# EAGLE board Dragino Pan.v1.7 (EAGLE 7.5.0)
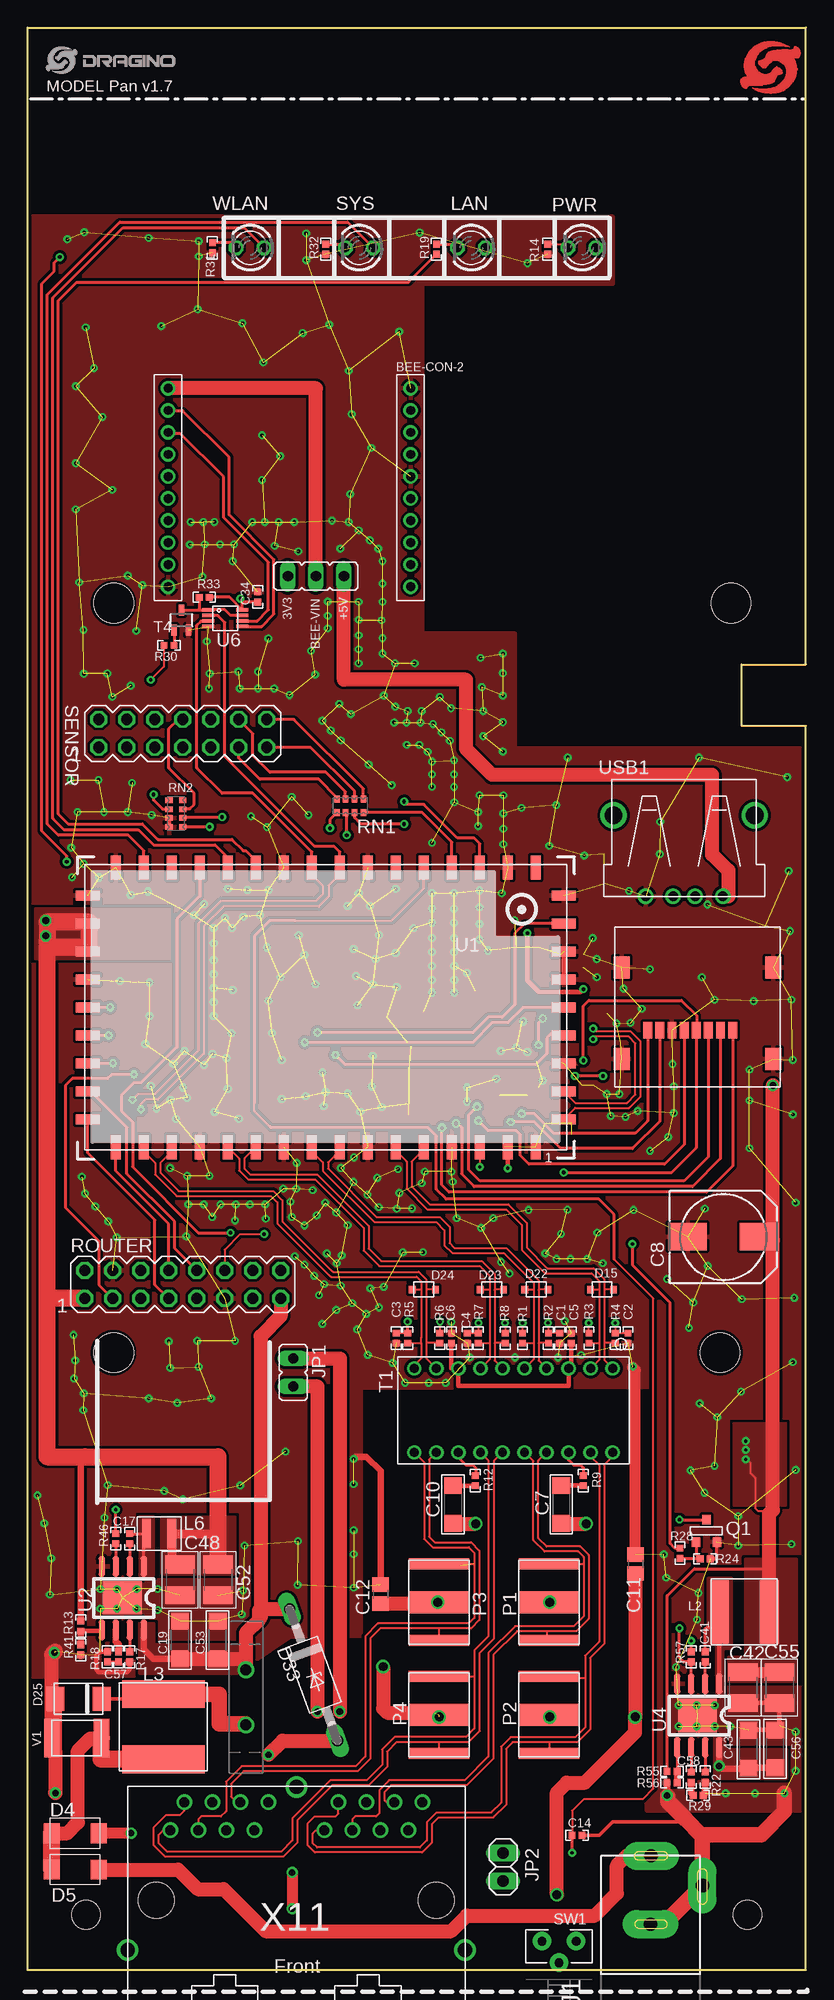
[diagram p0: board, top side]
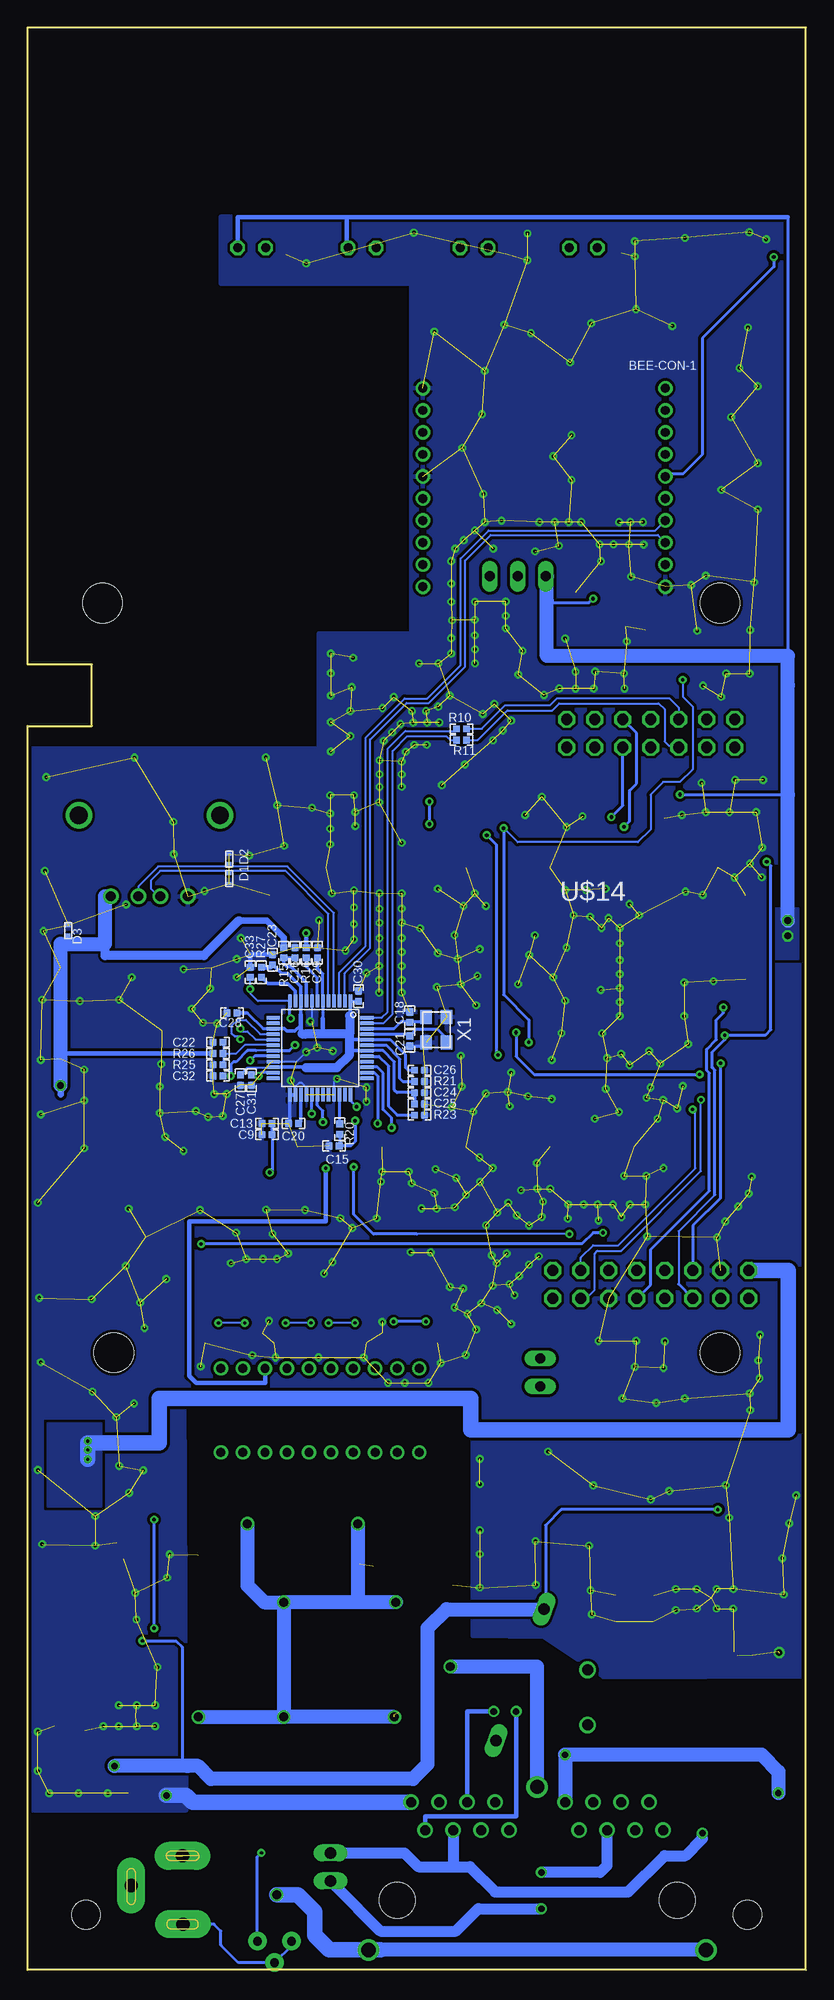
[diagram p1: board, bottom side, seen from below]

Size 70.61 x 176.23 mm. Coordinates in mm from the lower left corner, seen from the top.
Outline: 0,0 70.61,0 70.61,112.86 64.77,112.86 64.77,118.45 70.61,118.45 70.61,176.23 0,176.23 0,0
Copper layers (1*16): Top 0.035mm / dielectric 1.5mm / Bottom 0.035mm
Design rules "default *": minimum track width 8mil, minimum drill 12mil, track to track 8mil, track to pad 8mil, pad to pad 6mil, via to via 8mil, smd to smd 8mil, copper to edge 10mil, drill to drill 8mil, minimum pad ring 10mil, minimum via ring 8mil, stop-mask expansion 1mil, vias tented up to drill 30mil, thermal gap 10mil
Net classes: 0 default: width 0.203 mm, clearance 0.254 mm; 2 gnd: width 0.305 mm, drill 0.33 mm, clearance 0.254 mm; 3 usbvcc: width 0.254 mm, drill 0.61 mm, clearance 0.254 mm; 5 usbtrace: width 0.254 mm, clearance 0.152 mm; 6 usbtrace-4layer: width 0.191 mm, clearance 0.203 mm
Holes 3.6 mm at 62.81,56 7.81,56 63.81,124 7.81,124
Holes 2.6 mm at 65.31,5 5.31,5
tKeepout: area 4.8,53 to 10.8,59; area 59.8,53 to 65.8,59; area 60.8,121 to 66.8,127; area 4.8,121 to 10.8,127

## Footprints (pad centres in the part's own frame; a part is rotated, then mirrored left to right if it is on the bottom)
10P-2.0MM = drill 0.8 pad 1.27: 1 0,9; 2 0,7; 3 0,5; 4 0,3; 5 0,1; 6 0,-1; 7 0,-3; 8 0,-5; 9 0,-7; 10 0,-9
JP2 = drill 0.914 long: 1 -2.54,0; 2 0,0; 3 2.54,0
C0402 = smd 0.61 x 0.61: 1 -0.457,0; 2 0.457,0
C1206 = smd 1.52 x 1.6: 1 -1.71,0; 2 1.71,0
140CLH-0810 = smd 3.5 x 2.5: + 3.25,0; - -3.25,0
C0805 = smd 1.3 x 1.5: 1 -0.85,0; 2 0.85,0
C1210 = smd 1.6 x 2.7: 1 -1.4,0; 2 1.4,0
SOD−923 = smd 0.3 x 0.4: P$1 -0.45,0; P$2 0.45,0
DO214AC = smd 1.45 x 1.8: A 2.13,0; C -2.13,0
SOD−323 = smd 0.6 x 0.7: P$1 -1.05,0; P$2 1.05,0
DO-214AA = smd 1.62 x 2.18: A 2.11,0; C -2.11,0
F126Z12 = drill 1.016 long: A 6.35,0; C -6.35,0
GR72-135 = drill 1: P$1 -2.5,0; P$2 2.5,0
POWER_JACK_SLOT = drill 1.2 pad 2.54 long: GND@1 0,0; GND@2 4.7,3.5; PWR 0.04,6.2
JP1 = drill 0.914 long: 1 0,-1.27; 2 0,1.27
1X02 = drill 1.016 long: 1 -1.27,0; 2 1.27,0
SWPA6028S = smd 5.7 x 1.7: P$1 0,2.25; P$2 0,-2.25
LVS808040 = smd 2.5 x 7.5: P$1 -2.95,0; P$2 2.95,0
SWPA3010S = smd 0.8 x 2.7: P$1 -1.15,0; P$2 1.15,0
LED3MM = drill 0.813 octagon: A -1.27,0; K 1.27,0
GDT-LT-B3D090L = smd 1 x 5.5: 1 -3.48,0; 3 3.48,0 | smd 2 x 5.5: 2 0,0
SOT-23 = smd 0.787 x 0.889: 1 0,-1.016; 2 -0.95,1.016; 3 0.95,1.016
R0402 = smd 0.61 x 0.61: 1 -0.457,0; 2 0.457,0
0603-ARC = smd 0.5 x 0.65: 1 -1.2,-0.625; 2 -0.4,-0.625; 3 0.4,-0.625; 4 1.2,-0.625; 5 1.2,0.625; 6 0.4,0.625; 7 -0.4,0.625; 8 -1.2,0.625
MA08-2 = drill 1.016 octagon: 1 -8.89,-1.27; 2 -8.89,1.27; 3 -6.35,-1.27; 4 -6.35,1.27; 5 -3.81,-1.27; 6 -3.81,1.27; 7 -1.27,-1.27; 8 -1.27,1.27; 9 1.27,-1.27; 10 1.27,1.27; 11 3.81,-1.27; 12 3.81,1.27; 13 6.35,-1.27; 14 6.35,1.27; 15 8.89,-1.27; 16 8.89,1.27
MA07-2 = drill 1.016 octagon: 1 -7.62,-1.27; 2 -7.62,1.27; 3 -5.08,-1.27; 4 -5.08,1.27; 5 -2.54,-1.27; 6 -2.54,1.27; 7 0,-1.27; 8 0,1.27; 9 2.54,-1.27; 10 2.54,1.27; 11 5.08,-1.27; 12 5.08,1.27; 13 7.62,-1.27; 14 7.62,1.27
TS-026 = drill 0.8 pad 1.676: 1 -1.55,-0.975; 2 1.55,-0.975; 3 0,0.975
RIONET_H2038 = drill 0.8: 1 -3.81,9; 2 -3.81,7; 3 -3.81,5; 4 -3.81,3; 5 -3.81,1; 6 -3.81,-1; 7 -3.81,-3; 8 -3.81,-5; 9 -3.81,-7; 10 -3.81,-9; 11 3.81,-9; 12 3.81,-7; 13 3.81,-5; 14 3.81,-3; 15 3.81,-1; 16 3.81,1; 17 3.81,3; 18 3.81,5; 19 3.81,7; 20 3.81,9
SOT323 = smd 0.5 x 1: 1 0,0.9; 2 -0.65,-0.9; 3 0.65,-0.9
HE50 = smd 0.9 x 2.198: 1 -19.05,12.69; 2 -16.51,12.69; 3 -13.97,12.69; 4 -11.43,12.69; 5 -8.89,12.69; 6 -6.35,12.69; 7 -3.81,12.69; 8 -1.27,12.69; 9 1.27,12.69; 10 3.81,12.69; 11 6.35,12.69; 12 8.89,12.69; 13 11.43,12.69; 14 13.97,12.69; 15 16.51,12.69; 16 19.05,12.69; 26 19.05,-12.69; 27 16.51,-12.69; 28 13.97,-12.69; 29 11.43,-12.69; 30 8.89,-12.69; 31 6.35,-12.69; 32 3.81,-12.69; 33 1.27,-12.69; 34 -1.27,-12.69; 35 -3.81,-12.69; 36 -6.35,-12.69; 37 -8.89,-12.69; 38 -11.43,-12.69; 39 -13.97,-12.69; 40 -16.51,-12.69; 41 -19.05,-12.69 | smd 2.198 x 0.9: 17 21.579,10.16; 18 21.579,7.62; 19 21.579,5.08; 20 21.579,2.54; 21 21.579,0; 22 21.579,-2.54; 23 21.579,-5.08; 24 21.579,-7.62; 25 21.579,-10.16; 42 -21.579,-10.16; 43 -21.579,-7.62; 44 -21.579,-5.08; 45 -21.579,-2.54; 46 -21.579,0; 47 -21.579,2.54; 48 -21.579,5.08; 49 -21.579,7.62; 50 -21.579,10.16
RT8250-SOP8 = smd 1.88 x 0.61: 1 -1.219,0; 2 -1.219,-1.27; 3 -1.219,-2.54; 4 -1.219,-3.81; 5 4.547,-3.81; 6 4.547,-2.54; 7 4.547,-1.27; 8 4.547,0 | smd 2.997 x 3.505: 9 1.651,-1.956
AU6350_LQFP-48 = smd 1.2 x 0.3: 1 -4.25,2.75; 2 -4.25,2.25; 3 -4.25,1.75; 4 -4.25,1.25; 5 -4.25,0.75; 6 -4.25,0.25; 7 -4.25,-0.25; 8 -4.25,-0.75; 9 -4.25,-1.25; 10 -4.25,-1.75; 11 -4.25,-2.25; 12 -4.25,-2.75; 25 4.25,-2.75; 26 4.25,-2.25; 27 4.25,-1.75; 28 4.25,-1.25; 29 4.25,-0.75; 30 4.25,-0.25; 31 4.25,0.25; 32 4.25,0.75; 33 4.25,1.25; 34 4.25,1.75; 35 4.25,2.25; 36 4.25,2.75 | smd 0.3 x 1.2: 13 -2.75,-4.25; 14 -2.25,-4.25; 15 -1.75,-4.25; 16 -1.25,-4.25; 17 -0.75,-4.25; 18 -0.25,-4.25; 19 0.25,-4.25; 20 0.75,-4.25; 21 1.25,-4.25; 22 1.75,-4.25; 23 2.25,-4.25; 24 2.75,-4.25; 37 2.75,4.25; 38 2.25,4.25; 39 1.75,4.25; 40 1.25,4.25; 41 0.75,4.25; 42 0.25,4.25; 43 -0.25,4.25; 44 -0.75,4.25; 45 -1.25,4.25; 46 -1.75,4.25; 47 -2.25,4.25; 48 -2.75,4.25
US8 = smd 0.3 x 1.1: 1 -0.75,-1.55; 2 -0.25,-1.55; 3 0.25,-1.55; 4 0.75,-1.55; 5 0.75,1.55; 6 0.25,1.55; 7 -0.25,1.55; 8 -0.75,1.55
RIONET_472192001_SD = smd 0.8 x 1.5: 1 3.2,-1.55; 2 2.1,-1.55; 3 1,-1.55; 4 -0.1,-1.55; 5 -1.2,-1.55; 6 -2.3,-1.55; 7 -3.4,-1.55; 8 -4.5,-1.55 | smd 1.45 x 2: G1 6.875,-4.15; G2 6.875,4.15; G3 -6.875,4.15; G4 -6.875,-4.15
USB_C42562 = drill 0.9: 1 -3.5,5.29; 2 -1,5.29; 3 1,5.29; 4 3.5,5.29 | drill 1.6: P$1 -6.4,-2.06; P$2 6.4,-2.06
BC301N-D = smd 1.4 x 3.5: P$1 -2.25,0; P$2 2.25,0
SMARTPRJ_CRYSTAL-3.2-2.5 = smd 1.3 x 1.05: 1 -1.15,-0.925; 2 1.15,-0.925; 3 1.15,0.925; 4 -1.15,0.925
EHERNET-1X2-PLASTIC1 = drill 0.9: 1-1 2.54,-7.49; 1-2 3.81,-4.95; 1-3 5.08,-7.49; 1-4 6.35,-4.95; 1-5 7.62,-7.49; 1-6 8.89,-4.95; 1-7 10.16,-7.49; 1-8 11.43,-4.95; 2-1 -11.43,-7.49; 2-2 -10.16,-4.95; 2-3 -8.89,-7.49; 2-4 -7.62,-4.95; 2-5 -6.35,-7.49; 2-6 -5.08,-4.95; 2-7 -3.81,-7.49; 2-8 -2.54,-4.95 | drill 1.3: P$1 0,-8.89; P$2 -15.3,5.9; P$3 15.3,5.9 | hole 3.25: -12.7,1.4; 12.7,1.4

## Placement (x,y rotation side)
BEE-CON-1  BEE-1  [10P-2.0MM]  12.75,134.5 0 top
BEE-CON-2  BEE-1  [10P-2.0MM]  34.75,134.5 0 top
BEE-VIN  1x3 , 2.54 弯针  [JP2]  26.16,126.45 0 top
C1  0.1uF  [C0402]  48.29,57.32 270 top
C2  0.1uF  [C0402]  54.47,57.32 270 top
C3  0.1uF  [C0402]  33.45,57.32 270 top
C4  0.1uF  [C0402]  39.87,57.32 270 top
C5  0.1uF  [C0402]  49.33,57.32 90 top
C6  0.1uF  [C0402]  38.45,57.32 90 top
C7  1000pF 2kv  [C1206]  48.42,42.23 270 top
C8  470uF 10v  [140CLH-0810]  63.12,66.5 0 top
C9  0.1uF  [C0402]  48.89,75.78 180 bottom
C10  1000pF 2kv  [C1206]  38.58,42.23 270 top
C11  0.1uF,100V  [C0805]  55.15,36.83 270 top
C12  0.1uF,100V  [C0805]  32.04,34.09 270 top
C13  1uF  [C0402]  48.89,76.79 180 bottom
C14  1pf  [C0402]  49.84,12.2 0 top
C15  10pf,NL  [C0402]  42.8,74.76 180 bottom
C16  2.2uF  [C0402]  46.35,92.29 90 bottom
C17  0.1u,50v  [C0402]  9.27,39.12 90 top
C18  18pF  [C0402]  35.94,86.44 90 bottom
C19  10uf,50v  [C1206]  13.84,29.93 90 top
C20  1uF  [C0402]  46.48,76.79 180 bottom
C21  18pF  [C0402]  35.94,84.28 270 bottom
C22  1uF  [C0402]  53.34,84.16 180 bottom
C23  4.7uF  [C0402]  48.39,91.65 90 bottom
C24  4.7uF  [C0402]  35.05,79.59 0 bottom
C25  1uF  [C0402]  35.05,78.57 0 bottom
C26  4.7uF  [C0402]  35.05,81.62 0 bottom
C27  0.1uF  [C0402]  51.31,80.73 270 bottom
C28  0.1uF  [C0402]  52.07,86.83 180 bottom
C29  0.1uF  [C0402]  44.32,92.29 90 bottom
C30  0.1uF  [C0402]  40.59,88.35 90 bottom
C31  4.7uF  [C0402]  50.29,80.73 270 bottom
C32  4.7uF  [C0402]  53.34,81.11 180 bottom
C33  0.1uF  [C0402]  50.42,90.51 90 bottom
C34  0.1u  [C0402]  20.88,124.57 90 top
C41  0.1u,50v  [C0402]  61.47,28.41 90 top
C42  22uf,10v  [C1210]  64.9,25.61 270 top
C43  10uf,50v  [C1206]  65.41,20.02 90 top
C48  22uF,10v  [C1210]  13.82,35.39 270 top
C52  22uF,10v  [C1210]  17.27,35.39 270 top
C53  10uf,50v  [C1206]  17.25,29.93 90 top
C55  22fu,10v  [C1210]  68.2,25.61 270 top
C56  10uf,50v  [C1206]  67.82,20.05 90 top
C57  2.7nf  [C0402]  8.25,28.41 90 top
C58  2.7nf  [C0402]  60.2,17.48 90 top
D1  ESD7951ST5G  [SOD−923]  52.32,99.02 270 bottom
D2  ESD7951ST5G  [SOD−923]  52.32,100.8 90 bottom
D3  ESD7951ST5G  [SOD−923]  66.93,94.32 90 bottom
D4  STPS1L30  [DO214AC]  4.32,12.4 0 top
D5  STPS1L30  [DO214AC]  4.32,9.1 0 top
D15  BS05C  [SOD−323]  52.11,61.72 0 top
D22  BS05C  [SOD−323]  46.15,61.72 0 top
D23  BS05C  [SOD−323]  42.11,61.72 0 top
D24  BS05C  [SOD−323]  35.94,61.72 0 top
D25  SMBJ43A  [DO-214AA]  4.61,24.59 180 top
D33  1N4001  [F126Z12]  25.94,26.77 290 top
F2  GRD-GR72-135 1.35A  [GR72-135]  19.81,24.72 90 top
J1  POWER_JACKSLT  [POWER_JACK_SLOT]  56.52,4.15 0 top
JP1  [JP1]  24.11,54.2 180 top
JP2  [1X02]  43.13,9.33 270 top
L2  6.8uH / SWPA6045S6R8MT  [SWPA6028S]  65.02,32.47 90 top
L3  100uH, 1.4A, LVS808040-101  [LVS808040]  12.32,22.06 90 top
L6  4.7uH /SWPA3015S4R7MT  [SWPA3010S]  11.94,39.58 0 top
LAN  [LED3MM]  40.26,156.25 180 top
P1  3R420L  [GDT-LT-B3D090L]  47.31,33.36 270 top
P2  3R420L  [GDT-LT-B3D090L]  47.31,23.14 270 top
P3  3R420L  [GDT-LT-B3D090L]  37.34,33.36 270 top
P4  3R420L  [GDT-LT-B3D090L]  37.34,23.14 270 top
PWR  [LED3MM]  50.29,156.25 180 top
Q1  BSS138-7-F  [SOT-23]  61.59,39.84 180 top
R1  49.9  [R0402]  44.91,57.32 270 top
R2  49.9  [R0402]  47.24,57.32 270 top
R3  49.9  [R0402]  50.92,57.32 270 top
R4  49.9  [R0402]  53.31,57.32 270 top
R5  49.9  [R0402]  34.49,57.32 270 top
R6  49.9  [R0402]  37.38,57.32 270 top
R7  49.9  [R0402]  40.89,57.32 270 top
R8  49.9  [R0402]  43.33,57.32 270 top
R9  75  [R0402]  50.41,44.4 90 top
R10  330,NL  [R0402]  31.24,112.61 180 bottom
R11  330, NL  [R0402]  31.24,111.59 0 bottom
R12  75  [R0402]  40.61,44.39 90 top
R13  75K 1%  [R0402]  4.83,31.2 90 top
R14  330  [R0402]  47.18,156.13 90 top
R15  0R  [R0402]  47.37,92.29 270 bottom
R16  0R  [R0402]  45.34,92.29 270 bottom
R17  180K  [R0402]  9.27,28.41 270 top
R18  16K 1%  [R0402]  7.24,28.41 270 top
R19  330  [R0402]  37.08,156.13 90 top
R20  0R  [R0402]  42.29,76.28 270 bottom
R21  680  [R0402]  35.05,80.6 180 bottom
R22  180K  [R0402]  61.47,17.48 270 top
R23  330  [R0402]  35.05,77.55 0 bottom
R24  47K,NL  [R0402]  61.47,37.3 180 top
R25  470K  [R0402]  53.34,82.13 180 bottom
R26  47K  [R0402]  53.34,83.14 180 bottom
R27  0R  [R0402]  49.4,90.51 270 bottom
R28  4.7k  [R0402]  59.18,37.8 270 top
R29  24K  [R0402]  60.83,15.83 0 top
R30  4.7K  [R0402]  12.83,120.18 180 top
R31  330  [R0402]  16.76,156.25 90 top
R32  330  [R0402]  27.05,156.13 90 top
R33  100K  [R0402]  16.03,124.54 0 top
R41  24K 1%  [R0402]  4.83,29.04 90 top
R46  100K  [R0402]  8,39.12 270 top
R55  53.6K 1%  [R0402]  58.47,18.02 180 top
R56  10K 1%  [R0402]  58.47,16.97 0 top
R57  100K  [R0402]  60.2,28.41 90 top
RN1  4D02WGJ0000TCE 0ohm , NL  [0603-ARC]  29.26,105.62 0 top
RN2  4D02WGJ0000TCE 0ohm , NL  [0603-ARC]  13.46,104.91 270 top
ROUTER  [MA08-2]  14.07,62.19 0 top
SENSOR  [MA07-2]  14.07,112.19 0 top
SW1  TS-026  [TS-026]  48.21,1.62 180 top
SYS  [LED3MM]  30.1,156.25 180 top
T1  RJ45_TRANSFORMER_HST2038DR  [RIONET_H2038]  44.08,50.76 270 top
T4  2SC4081/SC70  [SOT323]  13.94,122.46 0 top
U1  HE  [HE50]  27.05,87.33 180 top
U2  RT7272  [RT8250-SOP8]  10.54,35.39 270 top
U3  AU6353  [AU6350_LQFP-48]  44.07,83.65 270 bottom
U4  RT7272  [RT8250-SOP8]  62.74,24.72 270 top
U6  NC7WZ125  [US8]  17.93,122.64 270 top
U$3  LOGO-NEW  [LOGO-SILK-NEW]  1.67,172.05 0 top
U$7  [DRGAINO_LOGO_STOP]  64.51,170.07 0 top
U$14  [RIONET_472192001_SD]  60.76,86.8 0 top
USB1  USB_C42562  [USB_C42562]  59.56,102.7 180 top
V1  BC301N-D  [BC301N-D]  4.44,21.04 0 top
WLAN  [LED3MM]  20.19,156.25 180 top
X1  12Mhz  [SMARTPRJ_CRYSTAL-3.2-2.5]  33.53,85.3 270 bottom
X11  EHERNET-1X2-PLASTIC  [EHERNET-1X2-PLASTIC1]  24.38,7.72 180 top

## Library data of the parts
BEE-CON-1 BEE-CON-2 C7 C10-C12 C19 C34 C42 C43 C48 C52 C53 C55 C56 L2 USB1 X11 = dragino-passive
BEE-VIN C1-C6 C8 C9 C13-C18 C20-C33 C41 C57 C58 D1-D5 D15 D22-D25 F2 J1 JP1 L3 L6 P1-P4 R1-R33 R41 R46 R55-R57 T1 U1-U4 U6 U$3 U$7 U$14 V1 = dragino
D33 = diode
JP2 = pinhead
LAN PWR SYS WLAN = led
Q1 ROUTER SENSOR = dragino; OC_FARNELL: unknown; OC_NEWARK: unknown
RN1 RN2 = resistor-dil; OC_FARNELL: unknown; OC_NEWARK: unknown
SW1 = _RoweTel
T4 = zetex; MPN: DSS4160U-7; OC_FARNELL: 1710696; OC_NEWARK: 25R4558
X1 = rionita7

## Nets
2.0V_CTL: C5.1 C6.1 T1.3 T1.8 U1.2
+3V3: BEE-VIN.1 C34.1 C48.1 C52.1 L6.P$2 LAN.A PWR.A R13.2 R33.2 RN2.2 ROUTER.1 U1.23 U1.24 U6.8
+5V: BEE-VIN.3 C8.+ C42.1 C55.1 D3.P$1 L2.P$2 R15.1 R26.2 R55.2 ROUTER.2 USB1.1
/BEE_OE: R33.1 T4.1 U6.1 U6.7
/RESET: ROUTER.3 U1.43
BEE-RXD: BEE-CON-1.3 U6.6
BEE-TXD: BEE-CON-1.2 U6.5
BEE-VIN: BEE-CON-1.1 BEE-VIN.2
CHIP_RESETN: C22.1 R25.1 R26.1 U3.18
CPWR_V33: C9.1 C13.1 U3.20 U$14.4
DC-VIN: D5.A J1.PWR
DP1_OVRCUR: U3.14
DP1_PWRUP: U3.13
GND: BEE-CON-1.10 BEE-CON-2.1 BEE-CON-2.5 C1.2 C2.2 C3.2 C4.2 C5.2 C6.2 C8.- C9.2 C11.1 C12.1 C13.2 C14.2 C15.2 C16.2 C18.2 C19.2 C20.2 C21.2 C22.2 C23.2 C24.2 C25.2 C26.2 C27.2 C28.2 C29.2 C30.2 C31.2 C32.2 C33.2 C34.2 C42.2 C43.2 C48.2 C52.2 C53.2 C55.2 C56.2 D1.P$2 D2.P$2 D3.P$2 D25.A D33.A J1.GND@1 J1.GND@2 Q1.2 R14.1 R17.2 R18.1 R21.1 R22.2 R23.2 R24.1 R25.2 R29.2 R31.1 R32.1 R41.1 R56.1 RN2.3 RN2.4 ROUTER.4 ROUTER.11 SW1.2 SW1.3 T4.3 U1.1 U1.4 U1.7 U1.10 U1.13 U1.22 U1.25 U1.26 U1.32 U1.35 U1.40 U1.42 U1.44 U1.45 U1.48 U2.4 U2.9 U3.8 U3.21 U3.25 U3.26 U3.28 U3.33 U4.4 U4.9 U6.4 U$14.6 U$14.G1 U$14.G2 U$14.G3 U$14.G4 USB1.4 V1.P$1 X1.2 X1.4 X11.1-1 X11.2-1
GPIO1: R28.1 U1.29
GPIO15: RN1.4 U1.38
GPIO16: RN1.3 U1.39
GPIO18: ROUTER.10 U1.18
GPIO19: ROUTER.6 U1.19
GPIO20: BEE-CON-1.5 ROUTER.5 U1.20
GPIO21: ROUTER.8 U1.16
GPIO22: ROUTER.7 U1.17
GPIO23: ROUTER.9 U1.21
GPIO24: ROUTER.12 U1.3
GPIO26: RN1.2 U1.47
GPIO27: R30.2 RN1.1 U1.46
JUMPSTART: C14.1 SW1.1 U1.37
LAN_LED: R19.1 U1.31
LED_SYS: SYS.A U1.27
N$1: C1.1 R1.1 R2.1
N$2: C17.2 L6.P$1 U2.1
N$3: C2.1 R3.1 R4.1
N$4: C3.1 R5.1 R6.1
N$5: C4.1 R7.1 R8.1
N$6: PWR.K R14.2
N$7: R23.1 U3.41
N$8: C20.1 U3.27
N$9: C57.1 R18.2
N$10: R9.2 T1.18
N$11: SENSOR.2
N$12: C7.1 R9.1
N$13: C57.2 U2.6
N$14 [gnd]: R55.1 R56.2 U4.5
N$15: Q1.1 R57.1 U4.3
N$16: R21.2 U3.43
N$17: R12.2 T1.13
N$18: C10.1 R12.1
N$19: R22.1 U4.7
N$20: Q1.3 R24.2 R28.2
N$21: C58.2 U4.6
N$22: C15.1 R20.2 U$14.5
N$23: LAN.K R19.2
N$24: R27.2 U3.11
N$25: R46.2 U2.3
N$26: R17.1 U2.7
N$27: C17.1 U2.2
N$28: C58.1 R29.1
N$29: C16.1 R15.2 U3.9
N$30: R16.2 U3.7
N$31: R31.2 WLAN.K
N$32: R32.2 SYS.K
N$33: SENSOR.1
N$34: C41.2 L2.P$1 U4.1
N$35: RN1.5 SENSOR.14
N$36: R30.1 T4.2
N$38: ROUTER.16
N$43: SENSOR.3
N$45: SENSOR.7
N$46: RN2.6 SENSOR.9
N$47: RN1.8 SENSOR.11
N$48: RN1.6 SENSOR.13
N$49: R13.1 R41.2 U2.5
N$50: SENSOR.4
N$52: U1.36
N$53: D25.C F2.P$1 L3.P$2
N$54: RN2.7 SENSOR.8
N$55: C41.1 U4.2
N$56: RN2.5 SENSOR.10
N$57: RN1.7 SENSOR.12
OPTIONAL_ANT: U1.41
P0_R_N: P1.3 T1.17 X11.2-3
P0_R_P: P1.1 T1.16 X11.2-6
P0_RX_N: D22.P$2 R2.2 T1.4 U1.8
P0_RX_P: D22.P$1 R1.2 T1.5 U1.9
P0_T_N: P2.3 T1.20 X11.2-7
P0_T_P: P2.1 T1.19 X11.2-8
P0_TX_N: D15.P$2 R4.2 T1.1 U1.5
P0_TX_P: D15.P$1 R3.2 T1.2 U1.6
P4_R_N: P3.3 T1.12 X11.1-3
P4_R_P: P3.1 T1.11 X11.1-6
P4_RX_N: D24.P$2 R6.2 T1.9 U1.14
P4_RX_P: D24.P$1 R5.2 T1.10 U1.15
P4_T_N: P4.3 T1.15 X11.1-7
P4_T_P: P4.1 T1.14 X11.1-8
P4_TX_N: D23.P$2 R8.2 T1.6 U1.11
P4_TX_P: D23.P$1 R7.2 T1.7 U1.12
PE: C7.2 C10.2 C11.2 C12.2 P1.2 P2.2 P3.2 P4.2 X11.P$1 X11.P$2 X11.P$3
POE_PASSTHROUGH: JP2.2 X11.1-4
POE_VIN: D4.A JP2.1 X11.2-4
RING: JP1.1 X11.2-5
SD_CLK: R20.1 U3.34
SD_CMD: U3.36 U$14.3
SD_DAT0: U3.30 U$14.7
SD_DAT1: U3.29 U$14.8
SD_DAT2: U3.39 U$14.1
SD_DAT3: U3.38 U$14.2
TIP: JP1.2 X11.2-2
UART_RX: ROUTER.13 U1.33 U6.3
UART_TX: ROUTER.14 U1.34 U6.2
USB2_D1_N: R11.2 SENSOR.5
USB2_D1_P: R10.1 SENSOR.6
USB2_D_N: R11.1 U3.47
USB2_D_P: R10.2 U3.48
USB3_D_N [usbtrace]: BEE-CON-1.8 U3.2
USB3_D_P [usbtrace]: BEE-CON-1.7 U3.3
USB4_D_N [usbtrace-4layer]: D2.P$1 U3.4 USB1.2
USB4_D_P [usbtrace-4layer]: D1.P$1 U3.5 USB1.3
USB_N: U1.50 U3.17
USB_P: U1.49 U3.16
VCC1.8: C31.1 C32.1 C33.1 R16.1 U3.12 U3.19 U3.23
VCC3.3: C23.1 C24.1 C25.1 C26.1 C27.1 C28.1 C29.1 C30.1 R27.1 U3.1 U3.6 U3.10 U3.15 U3.22 U3.42 U3.44
VDD: C19.1 C43.1 C53.1 C56.1 D33.C F2.P$2 R46.1 R57.2 ROUTER.15 U2.8 U4.8
VIN1: D4.C D5.C L3.P$1 V1.P$2
WAN_LED: U1.28
WLAN_LED: U1.30 WLAN.A
XSCI: C18.1 U3.46 X1.1
XSCO: C21.1 U3.45 X1.3

## Tracks (layer width: path | path; a pad name or v marks a point on that pad's centre or on a via)
2.0V_CTL  (via drill 0.3)
  Top 0.406: U1.2 v43.56,72.73 | C6.1 38.45,54.57 T1.8 39.08,52.99 49.07,52.99 T1.3 49.33,54.82 C5.1
  Top 0.508: 43.56,74.78 U1.2
  Bottom 0.406: v43.56,72.73 43.56,67.93 55.96,67.93 55.96,53.88 55.32,53.25 49.07,53.25 T1.3
+3V3  (via drill 0.33, 0.6)
  Top 0.203: 2.29,50.25 2.29,48.98 1.78,48.98
  Top 0.254: 20.95,124.04 C34.1 19.61,124.11 v19.3,124.42 19.48,124.24 U6.8 18.33,124.54 R33.2 | v11.43,106.64 11.43,106.13 12.25,105.31 RN2.2
  Top 0.61: R13.2 4.83,46.16 5.23,46.57
  Top 0.813: C48.1 13.74,36.71 13.28,36.71 13.09,36.91 L6.P$2 17.27,39.58
  Top 1.524: 1.78,60.92 1.78,48.98 1.78,46.57 5.23,46.57 17.27,46.57 17.27,39.58 C52.1 | ROUTER.1 1.78,60.92 | 1.78,60.92 1.78,92.79 5.59,92.79 5.59,94.44 5.6,94.44 5.6,95.06 1.78,95.06 1.78,93.3
  Bottom 0.254: 1.65,159.05 1.65,119.21 | v11.43,106.64 1.65,106.64 | 23.49,124.16 23.37,124.04 19.68,124.04 v19.3,124.42
  Bottom 0.406: PWR.A 51.56,159.05 41.66,159.05 | LAN.A 41.66,156.25 41.66,159.05 | 1.65,159.05 41.66,159.05 | 1.65,116.54 1.65,107.91 1.78,107.78
  Bottom 1.27: v1.65,95.21 1.65,106.64 1.65,116.54 1.65,119.21 23.49,119.21 23.49,124.16 23.49,126.45 BEE-VIN.1
  other vias: 1.65,93.81
  pour Top (isolate 0.254, no thermals): 0.63,96.35 12.95,96.35 12.95,91.65 0.63,91.65
  pour Bottom (no thermals): 0.63,96.35 12.95,96.35 12.95,91.65 0.63,91.65
  pour Top (isolate 0.305, no thermals): 18.8,35.9 12.19,35.9 12.19,41.1 18.8,41.1
+5V  (via drill 0.3, 0.6)
  Top 0.203: 67.61,41.72 67.56,41.66 66.22,41.66 65.99,41.89 65.99,44.64 65.58,45.04 65.58,45.96 65.36,46.17 65.29,46.17 v65.15,46.31
  Top 0.254: R55.2 58.01,33.94 60.48,36.41 67.27,36.41
  Top 1.016: C42.1 C55.1
  Top 1.27: 67.61,41.72 67.61,66.23 | 67.61,66.23 v67.61,80.25 | 67.56,41.66 67.27,41.37 67.27,36.41 L2.P$2 | C8.+ 67.34,66.5 67.61,66.23 | USB1.1 63.57,97.41 63.57,99.78 63.5,99.78 62.1,101.18 62.1,108.41 42.16,108.41 39.75,110.83 39.75,117.05 28.7,117.05 BEE-VIN.3
  Bottom 0.305: D3.P$1 66.93,93.1
  Bottom 0.406: R26.2 67.61,83.14
  Bottom 0.61: 67.61,79.43 67.61,80.75 | R15.1 47.37,93.68 48.89,95.21 51.44,95.21
  Bottom 0.813: 51.44,95.21 54.61,92.03 63.57,92.03 63.57,93.81
  Bottom 1.016: v65.15,47.18 v65.15,47.99
  Bottom 1.27: v67.61,80.25 67.61,80.75 67.61,83.14 67.61,93.1 66.93,93.1 63.57,93.1 63.57,93.81 63.57,97.41 USB1.1
  Bottom 1.422: ROUTER.2 1.63,63.46 1.63,48.98 30.43,48.98 30.43,51.85 58.65,51.85 58.65,47.81 65.15,47.81 v65.15,47.18 v65.15,46.31
  pour Bottom (no thermals): 63.88,49.61 63.88,41.99 68.83,41.99 68.83,49.61
  pour Top (no thermals): 64.01,49.61 64.01,42.12 68.83,42.12 68.83,49.61
  pour Top (isolate 0.254, no thermals): 69.72,26.12 63.63,26.12 63.63,28.41 65.15,28.41 65.15,37.3 69.72,37.3
/BEE_OE
  Top 0.254: 13.93,123.35 T4.1 15.49,123.36 | 15.49,123.36 16.35,123.36 U6.1 16.39,123.4 17.91,123.4 18.42,122.89 U6.7 | R33.1 15.57,123.44 15.49,123.36
/RESET  (via drill 0.3, 0.33)
  Top 0.254: v9.65,81.24 7.62,81.24 7.24,80.86 4.06,80.86 3.43,80.22 3.43,69.17 6.48,66.12 6.48,62.16 ROUTER.3 | U1.43 45.08,94.95 44.2,94.06 44.2,87.59 43.05,86.44 41.78,86.44 40.39,85.05 v26.29,85.05
  Bottom 0.254: v26.29,85.05 26.29,82.89 24.64,81.24 v9.65,81.24
BEE-RXD
  Top 0.254: U6.6 20.83,122.39 21.84,123.4 21.84,127.72 17.78,131.78 17.78,135.47 13.84,139.4 12.85,139.4 BEE-CON-1.3
BEE-TXD
  Top 0.254: U6.5 21.22,121.89 22.35,123.02 22.35,127.97 18.29,132.04 18.29,137.24 14.1,141.44 12.82,141.44 BEE-CON-1.2
BEE-VIN
  Top 1.27: BEE-VIN.2 26.16,143.5 BEE-CON-1.1
CHIP_RESETN
  Bottom 0.203: U3.18 50.93,83.9 51.69,83.14 R26.1 | C22.1 R26.1 | R26.1 R25.1
CPWR_V33  (via drill 0.33)
  Top 0.254: v50.42,82.51 50.42,87.46 50.93,87.97 59.31,87.97 60.71,86.57 60.71,85.3 U$14.4 60.66,74.58 58.42,72.35 v48.64,72.35
  Bottom 0.254: U3.20 50.03,82.9 v50.42,82.51 | C13.1 48.44,72.55 v48.64,72.35
  Bottom 0.305: C13.1 C9.1
DC-VIN  (1 unrouted)
  Top 1.27: D5.A 13.66,9.1 15.44,7.32 17.78,7.32 21.59,3.51 38.43,3.51 39.83,4.91 51.44,4.91 53.47,6.94 53.47,9.48 54.36,10.37 57.29,10.37
GND  (via drill 0.3, 0.58, 0.6)  (535 unrouted)
  Top 0.203: 2.16,19.9 2.2,19.9 V1.P$1
  Top 0.254: R24.1 62.33,37.3 62.53,37.5 62.53,38.81 Q1.2 | RN2.3 RN2.4
  Top 0.305: D25.A 2.86,24.59 2.2,25.25 | C14.2 51.87,12.2 53.09,13.42 59.56,13.42 59.75,13.61
  Top 0.406: V1.P$1 2.29,20.95 | R17.2 9.27,27.26 9.02,27.01 6.48,27.01 6.22,27.26 6.22,28.53 6.55,28.86 R18.1 | C42.2 C55.2 68.2,22.14 C56.2 65.43,21.76 C43.2 | U1.44 U1.45
  Top 0.61: R22.2 61.47,16.01 R29.2 | R56.1 v58.01,15.83 | C12.1 32.04,45.26 30.73,46.57 29.78,46.57 v29.58,46.36
  Top 1.016: C11.1 55.15,54.41 54.86,54.69
  Top 1.27: 2.2,28.61 2.16,28.61 2.16,19.9 2.5,19.9 | 2.5,19.9 D25.A | 2.5,19.9 2.5,16.07 v2.52,16.06 | 58.09,15.76 v58.01,15.83 | v21.84,19.52 23.13,20.8 D33.A
  Top 1.422: 2.2,28.61 2.5,28.91 | 58.09,15.76 58.09,15.27 59.75,13.61 61.09,12.28 | 61.09,12.28 61.21,12.15 J1.GND@2 57.71,4.15 J1.GND@1 | v68.66,16.02 68.66,14.39 66.55,12.28 61.09,12.28
  Bottom 0.203: C15.2 43.31,74.76 | v42.54,80.86 42.82,80.58 U3.33 | U3.28 45.32,80.07 45.72,80.47 45.97,80.47 46.35,80.09 46.35,79.44 U3.26 | U3.8 44.82,86.06 v44.96,86.06 | U3.21 46.21,82.4 v45.34,83.27
  Bottom 0.254: C21.2 34.78,83.83 X1.2 | SW1.2 46.66,2.2 SW1.3 51.49,0.65 53.09,2.24 53.09,3.51 53.72,4.15 J1.GND@1
  Bottom 0.305: 46.35,79.44 46.39,79.4 U3.25 46.82,76.91 C20.2
  Bottom 0.406: C23.2 50.42,92.11 C33.2
  Bottom 1.27: X11.1-1 v21.84,19.52 4.03,19.52 2.5,17.99 2.5,16.07 v2.52,16.06 | X11.2-1
  Bottom 1.422: X11.2-1 55.63,15.2 56.26,15.83 v58.01,15.83
  other vias: 2.44,28.79 12.8,57.03 15.39,57.08 15.52,54.72 12.93,54.62 5.11,52.31 5.05,50.78 4.22,53.65 4.32,55.3 4.17,57.62 8.08,66.45 7.32,67.9 6.15,69.27 5.21,70.44 4.93,71.97 26.44,61.22 28.02,59.88 29.92,58.1 29.44,60.5 26.75,58.61 30.71,59.52 36.04,72.42 52.91,77.48 31.72,71.86 32.13,78.27 14.48,72.04 16.51,72.04 44.17,95.23 55.35,77.94 5.08,100.37 4.02,99.13 33.35,114.61 25.27,155.13 15.52,156.85 62.56,50.15 60.96,51.39 31.88,60.1 42.95,64.22 51.69,66.89 41.15,67.32 34.04,65.11 28.5,64.83 21.62,68.16 18.82,68 16.66,51.85 11,51.85 0.9,43.05 12.4,43.45 60.4,60.55 64.8,60.85 60,58.25 14.47,79.13 16.97,77.83 18.17,79.93 19.17,77.23 13.47,77.23 42.92,83.37 44.34,83.68 9.37,97.53 3.97,101.83 9.86,121.5 5.07,121.58 5.11,117.61 27.23,124.15 21.85,120.8 23.77,115.68 22.37,116.26 35.57,157.63 25.27,157.55 15.53,155.47 30.86,55.79 40.12,55.57 38.44,58.78 32.32,61.98 33.12,55.07 35.86,65.11 43.72,63.18 44.22,55.57 48.12,55.57 48.72,58.87 50.22,55.77 48.39,66.78 53.68,79.46 58.02,62.68 14.4,66.56 33.26,113.18 57.72,37.7 30.05,122.49 54.56,97.9 56.46,90.79 46.73,80.69 39.87,78.78 39.87,80.05 54.92,54.76 61.4,43.29 60.13,45.32 31.23,80.15 8.38,89.7 18.04,82.73 16.9,90.35 18.17,98.09 10.93,97.84 31.88,93.89 29.59,92.62 16.51,117.62 7.24,117.62 57.94,35.59 58.83,27.47 60.86,34.2 60.73,31.78 7.26,43.98 23.39,47.02 24.54,38.9 63.33,16.02 65.99,16.02 69.68,18.05 69.68,21.61 64.47,38.5 64.47,41.16 69.29,38.62 69.68,45.35 62.31,45.74 64.72,52.47 69.55,60.98 69.42,55.13 69.68,69.61 58.63,77.74 58.63,80.15 56.47,74.31 48.97,68.98 58.12,75.58 65.48,78.88 69.42,77.61 62.31,88.03 58.5,82.18 65.87,87.9 65.48,81.68 69.42,82.57 69.29,88.03 69.17,94.25 68.91,108.22 69.04,99.71 60.91,110 47.96,105.68 57.36,101.23 61.67,96.66 50.5,101.11 47.32,102 43.01,97.68 38.69,97.68 38.69,92.34 54.05,89.04 51.64,91.71 53.42,85.87 31.32,82.95 27.04,79.64 24.37,70.88 29.58,44.08 29.58,39.89 29.58,37.73 29.58,34.68 24.5,34.93 19.42,32.27 19.67,38.49 19.29,43.95 6.97,41.03 14.09,42.68 1.51,40.52 2.02,34.05 13.58,51.44 18.82,57.08 24.41,73.21 29.62,73.72 10.67,84 11.06,89.59 16.9,89.08 21.85,87.93 21.72,92.76 33.41,92.25 33.41,98.09 21.85,97.97 18.55,94.54 11.06,86.54 6.48,99.11 21.72,103.68 33.03,107.49 29.32,113.94 38.72,105.94 43.16,106.57 44.81,105.43 49,110 57.39,104.16 32.11,122.45 30.05,121.09 28.27,114.87 7.7,115.5 9.35,116.52 16.46,116.26 19.13,117.79 19.25,116.26 4.69,125.89 10.4,125.64 14.72,129.32 15.87,126.4 4.38,136.7 4.38,132.51 4.38,143.69 18.6,127.81 3.61,157.02 5.14,157.66 10.98,157.15 30.03,124.13 43.11,117.65 38.46,72.42 34.4,111.15 35.54,111.15 36.3,110.51 36.68,109.62 36.68,108.48 36.68,107.34 36.68,102.26 36.68,97.68 36.68,96.29 36.68,95.02 36.68,93.62 36.68,92.35 36.68,91.08 36.68,89.81 36.68,88.67 38.72,88.67 38.72,89.81 38.72,91.08 38.69,93.61 38.69,95.01 38.69,96.28 38.69,107.33 38.69,108.47 38.69,109.74 38.31,111.52 37.54,112.28 36.78,113.05 35.64,113.17 34.37,113.17 27.24,121.71 27.24,122.86 24.57,128.7 32.19,124.13 32.19,125.78 28.38,128.95 35.75,114.22 32.32,115.62 43.11,119.43 32.19,120.83 32.19,119.43 41.33,114.22 43.11,115.62 41.33,111.94 43.11,113.21 43.11,110.54 41,106.57 40.88,105.05 43.16,104.92 40.88,103.78 43.16,103.53 43.16,102.13 41,97.94 41,96.41 41,94.89 41,93.49 41.76,92.48 39.86,90.45 19.95,97.97 16.01,96.7 15.12,95.68 16.9,91.62 17.91,95.43 16.9,94.54 16.9,93.14 19.56,95.55 21.09,95.68 16.9,87.81 16.9,86.54 16.77,83.11 16.01,82.09 14.1,80.06 11.18,80.19 13.21,82.22 14.23,83.36 11.69,78.16 12.96,78.92 54.24,77.39 38.94,68.21 42.24,68.21 33.6,72.65 65.48,74.56 33.73,70.49 34.87,69.1 35.76,71.38 26.87,78.37 38.56,71.51 25.86,70.75 26.24,68.46 27,69.6 28.02,68.71 29.03,67.57 23.19,70.87 52.54,79.46 54.7,85.93 55.72,87.2 28.42,72.75 54.97,68.94 29.57,71.48 30.84,70.34 31.85,69.2 33.5,69.07 23.85,69.71 23.98,68.31 27.15,65.01 12.93,72.75 14.58,69.45 15.98,69.45 16.74,68.31 17.5,69.45 18.9,69.45 20.17,69.45 21.56,69.45 25.12,67.55 24.23,64.75 25.12,63.99 28.04,64.12 26.01,62.97 26.9,62.21 28.42,62.09 31.09,61.83 45.44,68.94 46.96,65.01 47.98,64.5 49.25,64.5 50.77,64.5 52.17,64.12 61.44,69.07 61.7,63.86 61.17,90.06 51.64,90.06 51.26,93.61 23.07,79.01 30.18,77.87 25.1,92.09 26.11,89.42 31.32,89.42 20.27,104.66 9.1,126.51 45.35,154.84 30.03,119.81 30.03,118.54 33.33,118.54 35.11,118.54 41.08,119.05 41.21,116.38 34.48,114.22 38.41,114.48 37.4,115.49 20.9,117.79 20.9,116.26 26.75,113.34 36.4,53.27 37.92,53.27 34.24,53.27 6.59,34.55 8.12,34.55 9.9,34.55 11.8,34.55 6.59,32.78 8.12,32.78 9.9,32.78 11.8,32.65 19.55,34.43 2.15,37.35 59.04,24.01 60.7,24.01 62.35,24.01 59.04,22.11 60.7,22.11 62.35,22.11 63.74,22.11 11.26,104.79 9.1,105.04 6.94,105.04 4.52,105.04 3.89,107.97 6.43,107.97 9.48,107.71 23.96,106.44 25.48,104.79 29.04,96.54 31.07,96.54 30.05,97.68 18.49,84.98 18.62,88.92 22.18,84.98 22.94,90.06 23.07,82.57 26.75,81.42 25.23,79.26 29.04,79.52 29.92,87.52 31.58,91.71 33.48,89.17 35,94.5 29.8,90.19 24.59,93.87 30.94,109.36 27.51,112.45 28.4,111.56 16.26,120.54 16.06,129.33 17.46,129.33 18.73,129.33 22.41,129.21 14.79,131.37 15.93,131.37 16.95,131.37 20.38,131.37 21.52,131.37 22.79,131.37 24.19,131.37 27.62,131.49 29.14,131.37 30.03,130.6 31.05,129.72 31.81,128.95 32.19,127.81 5.27,149.02 6.03,145.34 12.12,149.15 19.49,149.4 27.36,149.27 29.14,145.08 33.71,148.64 21.39,145.84 21.27,139.24 21.27,135.18 22.92,137.34 31.17,138.1 29.27,133.91 29.4,141.15 7.68,134.29 6.79,140.89 24.95,148.51 15.43,150.67 26.09,117.52 25.71,119.68
  pour Top (rank 2): 18.36,26.55 23.83,30.23 30.23,30.31 30.23,52.79 56.39,52.92 56.16,14.5 70.61,14.5 70.61,110.83 44.2,110.83 44.2,121.24 35.81,121.24 35.81,152.99 53.09,152.99 53.09,159.09 -0.76,159.09 -0.38,26.63
  pour Bottom (rank 2): -0.38,26.63 18.36,26.55 23.83,30.23 30.23,30.31 30.23,52.79 56.39,52.92 56.23,14.5 70.61,14.5 70.61,110.83 44.2,110.83 44.2,121.24 35.81,121.24 35.81,152.99 53.09,152.99 53.09,159.09 -0.76,159.09
  pour Top (isolate 0.406, no thermals): 6.1,35.01 18.8,35.01 18.8,30.69 12.32,30.69 12.32,32.34 6.22,32.34
  pour Top (isolate 0.254, no thermals): 63.63,25.23 69.6,25.23 69.6,20.66 63.88,20.66 63.88,21.67 58.67,21.67 58.67,24.47 63.63,24.47
GPIO1  (via drill 0.3)
  Top 0.254: U1.29 15.62,97.42 13.54,95.33 13.54,83.73 10.29,80.47 9.65,80.47 8.51,79.33 8.51,77.94 9.52,76.92 9.52,72.86 15.49,66.89 v18.41,66.89 | v54.86,65.87 54.86,63.97 58.29,60.54 58.29,38.69 58.72,38.26 R28.1
  Bottom 0.254: v18.41,66.89 19.3,66.89 20.32,65.87 v54.86,65.87
GPIO15
  Top 0.254: U1.38 38.48,102.32 35.8,105 RN1.4
GPIO16  (via drill 0.33)
  Top 0.254: U1.39 41.02,102.19 40.51,102.7 38.99,102.7 35.94,105.75 34.16,105.75 v34.16,106 | v34.16,103.97 30.23,103.97 29.66,104.53 RN1.3
  Bottom 0.254: v34.16,106 v34.16,103.97
GPIO18
  Top 0.254: ROUTER.10 13.33,65.47 13.33,67.9 9.02,72.22 9.02,76.41 5.71,79.71 U1.18
GPIO19  (via drill 0.3)
  Top 0.254: v7.75,82.25 U1.19
  Bottom 0.254: v7.75,82.25 7.75,70.04 10.26,67.53 ROUTER.6
GPIO20  (via drill 0.3, 0.33)
  Top 0.254: v7.37,84.79 U1.20 | v3.56,100.54 3.56,101.05 1.27,103.34 1.27,152.99 2.41,154.13 2.41,154.9 v2.92,155.41
  Bottom 0.203: 8.25,70.31 11.56,67.01 11.56,62.22
  Bottom 0.254: ROUTER.5 11.56,62.22 | 8.25,70.31 8.25,81.62 8.51,81.87 8.51,83.27 7.37,84.41 v7.37,84.79 3.68,84.79 3.17,85.3 3.17,100.16 v3.56,100.54 | v2.92,155.41 2.92,154.52 9.4,148.04 9.4,137.5 11.18,135.72 12.53,135.72 BEE-CON-1.5
GPIO21
  Top 0.254: ROUTER.8 12.8,67.68 8,72.47 U1.16
GPIO22
  Top 0.254: ROUTER.7 11.56,62.16 11.56,68.03 5.47,74.11 U1.17
GPIO23  (via drill 0.3)
  Top 0.254: v7.49,87.33 U1.21
  Bottom 0.254: ROUTER.9 14.1,62.16 14.1,65.36 8.76,70.7 8.76,81.36 9.02,81.62 9.02,83.52 8.13,84.41 8.13,86.19 7.49,86.83 v7.49,87.33
GPIO24  (via drill 0.3)
  Top 0.203: U1.3 v41.02,72.86 | ROUTER.12 17.88,65.33 19.3,66.76 v21.46,66.76
  Bottom 0.203: v21.46,66.76 35.31,66.76
  Bottom 0.254: 35.31,66.76 39.24,66.76 41.02,68.54 v41.02,72.86
GPIO26  (via drill 0.3, 0.33)
  Top 0.254: U1.47 48.61,84.79 48.5,84.9 47.48,84.9 47.12,84.54 47.12,83.14 46.1,82.13 28.83,82.13 v27.94,83.02 | v28.96,102.95 28.96,104.9 RN1.2
  Bottom 0.254: v28.96,102.95 28.07,102.06 28.07,83.14 v27.94,83.02
GPIO27  (via drill 0.3, 0.33)
  Top 0.203: R30.2 12.37,118.25 v11.18,117.05
  Top 0.254: U1.46 44.96,87.33 43.56,85.94 42.16,85.94 40.39,84.16 v25.15,84.16 | RN1.1 27.43,104.37 v27.43,103.59
  Bottom 0.203: v11.18,117.05 11.18,115.53 10.29,114.64 10.29,108.92 11.43,107.78 12.95,107.78 14.1,106.64 14.1,103.46 15.24,102.32 26.16,102.32 v27.43,103.59
  Bottom 0.254: v27.43,103.59 27.43,88.48 25.15,86.19 v25.15,84.16
JUMPSTART  (via drill 0.3)
  Top 0.203: 53.21,64.47 56.77,60.92 56.77,16.47 55.79,15.49 50.46,15.49 49.4,14.44 49.4,12.22 C14.1 | 24.26,95.21 33.02,95.21 35.94,98.13 U1.37 | 21.97,76.54 20.57,77.94 20.57,78.7
  Top 0.254: 24.26,95.21 21.97,95.21 20.57,93.81 20.57,78.7 | 53.21,64.47 53.21,68.54 51.82,69.93 37.97,69.93 37.08,70.82 37.08,75.65 36.32,76.41 22.1,76.41 21.97,76.54 | C14.1 49.38,10.64 v49.4,10.62
  Bottom 0.254: SW1.1 49.76,10.27 v49.4,10.62
LAN_LED
  Top 0.254: 20.7,99.88 U1.31 20.7,100.67 19.81,101.56 19.56,101.56 18.54,102.57 11.81,102.57 10.41,103.97 3.68,103.97 2.79,104.86 2.79,151.47 4.44,153.12 34.53,153.12 R19.1
LED_SYS
  Top 0.254: U1.27 10.54,101.56 9.14,102.95 2.79,102.95 1.78,103.97 1.78,151.98 8.38,158.58 29.04,158.58 SYS.A
N$1  (via drill 0.3)
  Top 0.203: C1.1 R2.1 47.24,58.7 v47.21,58.7 | R1.1 | R1.1 v44.91,58.7
  Bottom 0.203: v44.91,58.7 v47.21,58.7
N$2
  Top 0.254: U2.1 10.54,39.33 L6.P$1 C17.2
  pour Top (isolate 0.254, no thermals): 10.16,35.77 11.43,35.77 11.43,41.1 10.16,41.1
N$3  (via drill 0.3)
  Top 0.203: C2.1 R4.1 v53.31,58.7 | R3.1 50.91,57.78 v50.91,58.7
  Bottom 0.203: v50.91,58.7 v53.31,58.7
N$4  (via drill 0.3)
  Top 0.203: C3.1 R5.1 | v37.41,58.83 37.41,57.78 R6.1
  Top 0.254: R5.1 34.48,57.78 v34.48,58.83
  Bottom 0.254: v34.48,58.83 v37.41,58.83
N$5  (via drill 0.3)
  Top 0.203: C4.1 R7.1 40.91,57.78 v40.91,58.7 | v43.31,58.7 43.33,58.7 R8.1
  Bottom 0.203: v40.91,58.7 v43.31,58.7
N$6
  Top 0.203: R14.2 48.69,156.58 PWR.K
N$7
  Bottom 0.254: 39.81,82.89 38.73,82.89 37.85,82 37.85,78.32 37.08,77.55 R23.1
  Bottom 0.305: U3.41 39.81,82.89
N$8
  Bottom 0.305: U3.27 45.82,77 C20.1
N$9
  Top 0.254: R18.2 C57.1
N$10
  Top 0.254: T1.18 49.08,46.26 49.53,45.8 50.16,45.8 50.42,45.55 R9.2
N$12
  Top 0.406: C7.1 R9.1
N$13
  Top 0.61: U2.6 8,29.78 8.25,29.52 C57.2
N$14
  Top 0.254: U4.5 58.93,17.48
  Top 0.61: R55.1 58.93,17.48 R56.2
N$15  (via drill 0.3)
  Top 0.254: U4.3 R57.1 59.51,27.95 59.13,28.33 v59.13,31 | v59.13,40.85 Q1.1
  Bottom 0.254: v59.13,31 v59.13,40.85
N$16
  Bottom 0.254: R21.2 36.58,80.6 36.83,80.86 36.83,82.63 38.1,83.9 U3.43
N$17
  Top 0.254: T1.13 39.08,46.48 39.75,45.8 40.39,45.8 40.64,45.55 40.64,44.88 R12.2
N$18
  Top 0.406: C10.1 R12.1
N$19
  Top 0.254: U4.7 R22.1
N$20
  Top 0.254: Q1.3 60.64,37.66 R24.2 60.96,37.35 R28.2
N$21
  Top 0.254: U4.6 C58.2
N$22  (via drill 0.33)
  Top 0.254: U$14.5 59.56,74.88 57.78,73.11 45.47,73.11 44.7,73.87 44.7,75.78 44.32,76.16 41.78,76.16 v40.89,77.05
  Bottom 0.254: R20.2 42.29,74.81 C15.1 41.27,74.76 40.89,75.14 v40.89,77.05
N$23
  Top 0.254: R19.2 38.99,156.58 LAN.K
N$24
  Bottom 0.305: U3.11 46.32,88.82 46.99,89.49 48.84,89.49 R27.2
N$25
  Top 0.254: R46.2 U2.3
N$26
  Top 0.254: U2.7 R17.1
N$27
  Top 0.254: C17.1 U2.2
N$28
  Top 0.61: C58.1 60.2,16.01 R29.1
N$29
  Bottom 0.305: U3.9 45.32,89.6 46.74,91.02 47.12,91.02 47.37,91.27 R15.2 C16.1
N$30
  Bottom 0.254: U3.7 44.32,90 45.34,91.02
  Bottom 0.305: 45.46,91.71 R16.2 45.34,91.02
N$31
  Top 0.254: WLAN.K 18.47,156.71 R31.2
N$32
  Top 0.254: R32.2 28.5,156.58 SYS.K
N$34
  Top 0.254: C41.2 61.47,30.95 61.59,31.07 62.61,31.07 62.74,31.2
  Top 0.406: U4.1 62.74,31.2 62.74,32.43 L2.P$1
  pour Top (isolate 0.254, no thermals): 62.48,25.1 63.12,25.1 63.12,28.79 63.12,29.17 63.88,29.17 63.88,35.52 61.72,35.52 61.72,29.55 62.48,29.55
N$35
  Top 0.254: RN1.5 30.46,107.16 24.16,113.46 SENSOR.14
N$36
  Top 0.254: T4.2 R30.1
N$46  (via drill 0.33)
  Top 0.254: RN2.6 14.18,104.61 v17.65,104.61
  Bottom 0.254: SENSOR.9 16.61,105.65 v17.65,104.61
N$47
  Top 0.254: RN1.8 28.06,106.39 26.42,108.03 21.08,108.03 19.15,109.97 SENSOR.11
N$48
  Top 0.254: RN1.6 29.66,106.95 25.69,110.92 SENSOR.13
N$49
  Top 0.406: R13.1 6.63,30.74 U2.5
  Top 0.61: R41.2 R13.1
N$53
  Top 0.305: D25.C 9.5,24.59 9.93,25.03 12.22,25.03 12.65,24.59 12.65,24.67 L3.P$2
  Top 0.813: 12.32,24.59 L3.P$2
  Top 1.422: L3.P$2 17.4,25 17.4,22.31 19.81,22.31 F2.P$1
N$54
  Top 0.254: RN2.7 14.14,105.37 14.73,105.37 15.11,105.75 15.11,106.76 12.83,109.05 12.83,112.61 13.68,113.46 SENSOR.8
N$55
  Top 0.254: U4.2 C41.1
N$56  (via drill 0.33)
  Top 0.254: RN2.5 v16.51,103.72
  Bottom 0.254: v16.51,103.72 16,104.22 16,107.02 15.37,107.65 15.37,112.22 SENSOR.10
N$57
  Top 0.254: RN1.7 28.83,106.28 28.83,106.89 27.05,108.67 21.97,108.67 20.45,110.19 20.45,112.16 SENSOR.12
P0_R_N
  Top 0.203: X11.2-3 32.61,15.2 32.36,15.45 32.36,16.12 32.99,16.75 39.85,16.75 42.27,19.17 42.27,28.56 44.42,30.72 47.12,30.72 | 47.12,30.72 49.75,30.72 50.9,31.87 50.9,37.64 50.13,38.41 47.08,38.41 46.33,39.17 46.33,46.2 T1.17 | 47.12,30.72 47.12,30.07 P1.3
P0_R_P
  Top 0.203: 50.44,36.91 50.44,37.45 49.94,37.95 46.89,37.95 45.87,38.98 45.87,46.16 T1.16 | 50.44,36.91 50.44,32.06 49.56,31.17 44.23,31.17 41.81,28.75 41.81,19.36 39.66,17.2 32.8,17.2 31.9,16.31 31.9,14.21 31.62,13.93 29.72,13.93 29.46,13.67 X11.2-6 | P1.1 50.37,36.84 50.44,36.91
P0_RX_N
  Top 0.203: 28.32,74.78 U1.8 28.32,74.33 27.25,73.26 27.25,72.7 31.64,68.31 37.38,68.31 38.28,67.41 38.28,65.94 38.73,65.49 43.4,65.49 46.35,62.54 46.35,61.72 | 46.35,56.86 46.35,61.68 46.35,61.72 | 46.35,56.86 46.35,55.3 T1.4 | R2.2 46.35,56.86 | D22.P$2 46.35,61.72
P0_RX_P
  Top 0.203: 25.78,74.78 U1.9 25.78,74.28 26.8,73.26 26.8,72.51 31.45,67.85 37.07,67.85 37.82,67.1 37.82,65.75 38.54,65.03 43.21,65.03 45.9,62.35 45.9,61.72 | 45.9,56.86 45.9,61.68 45.9,61.72 | 45.9,56.86 45.9,55.39 T1.5 | R1.2 45.9,56.86 | D22.P$1 45.9,61.72
P0_T_N
  Top 0.203: X11.2-7 28.19,14.18 27.94,13.93 26.03,13.93 25.42,13.32 25.42,11.29 26.07,10.65 35.78,10.65 36.68,11.55 36.68,13.2 37.31,13.83 42.26,13.83 43.41,14.97 43.41,20.06 44.01,20.66 47.37,20.66 | T1.20 53.08,46.58 52.3,45.8 52.3,29.58 51.03,28.31 51.03,21.81 49.88,20.66 47.37,20.66 | P2.3 47.37,19.73 47.37,20.66
P0_T_P
  Top 0.203: X11.2-8 26.92,12.66 26.16,12.66 25.88,12.38 25.88,11.48 26.26,11.11 35.59,11.11 36.22,11.74 36.22,13.39 37.12,14.28 42.07,14.28 42.95,15.17 42.95,20.25 43.82,21.11 49.69,21.11 50.57,22 50.57,26.5 | T1.19 51.08,46.57 51.84,45.8 51.84,29.77 50.57,28.5 50.57,26.5 | P2.1 47.43,26.5 50.57,26.5
P0_TX_N
  Top 0.203: U1.5 35.94,74.43 34.85,73.34 34.85,71.07 36.47,69.45 43.6,69.45 45.29,67.77 45.29,65.53 47.16,63.66 51.35,63.66 52.32,62.69 52.32,61.72 | 52.32,56.87 52.32,61.68 52.32,61.72 | 52.32,56.87 52.32,55.33 T1.1 | R4.2 52.32,56.87 | D15.P$2 52.32,61.72
P0_TX_P
  Top 0.203: U1.6 33.4,74.33 34.39,73.34 34.39,70.88 36.28,68.99 43.42,68.99 44.83,67.58 44.83,65.34 46.97,63.2 51.16,63.2 51.87,62.5 51.87,61.81 51.87,61.72 | 51.87,61.72 51.87,56.86 | 51.87,56.86 51.87,55.36 T1.2 | R3.2 51.87,56.86 | D15.P$1 51.87,61.72
P4_R_N
  Top 0.203: X11.1-3 18.97,15.2 18.47,15.7 18.47,16.88 19.6,18.02 29.94,18.02 31.09,19.17 31.09,30.09 31.97,30.97 37.34,30.97 | 37.34,30.97 40.23,30.97 41,31.74 41,38.02 40.23,38.79 36.92,38.79 36.42,39.3 36.42,46.3 T1.12 | P3.3 37.34,30.97
P4_R_P  (1 unrouted)
  Top 0.203: X11.1-6 15.49,13.67 15.75,13.93 17.53,13.93 18.01,14.41 18.01,17.07 19.41,18.47 29.75,18.47 30.63,19.36 30.63,30.28 31.78,31.43 40.04,31.43 40.54,31.93 40.54,36.79 | 35.96,36.66 39.27,36.66 | T1.11 35.97,46.06 35.97,39.1 36.73,38.34 40.04,38.34 40.54,37.84 40.54,36.79 | P3.1 40.49,36.84 40.54,36.79
P4_RX_N
  Top 0.203: 13.08,74.78 U1.14 13.08,74.25 12.04,73.21 12.04,72.34 13.71,70.67 22.27,70.67 23.11,69.83 23.11,68.99 | 23.11,68.99 23.11,67.92 27.7,63.33 35.48,63.33 36.17,62.64 36.17,61.72 | 36.17,56.86 36.17,61.68 36.17,61.72 | 36.17,56.86 36.17,55.48 T1.9 | T1.9 | R6.2 36.17,56.86 | 23.11,68.99 23.12,69 | D24.P$2 36.17,61.72
P4_RX_P
  Top 0.203: 10.54,74.78 U1.15 10.54,74.25 11.58,73.21 11.58,72.15 13.52,70.21 22.08,70.21 22.66,69.64 22.66,67.73 27.51,62.87 35.29,62.87 35.71,62.45 35.71,61.72 | 35.71,57.36 35.71,61.68 35.71,61.72 | 35.71,56.86 35.71,55.48 35.08,54.85 T1.10 | 35.71,57.36 | R5.2 35.71,56.86 | 35.71,56.86 35.71,57.36 | D24.P$1 35.71,61.72
P4_T_N
  Top 0.203: X11.1-7 14.22,14.44 13.84,14.05 12.57,14.05 11.45,12.94 11.45,11.29 12.48,10.27 23.21,10.27 24.49,11.55 24.49,13.58 27.65,16.75 30.96,16.75 32.61,18.4 32.61,19.8 33.5,20.68 37.34,20.68 | T1.15 43.06,46.95 42.29,46.19 42.29,30.06 41.02,28.79 41.02,21.67 40.03,20.68 37.34,20.68 | P4.3 37.34,20.68
P4_T_P
  Top 0.203: X11.1-8 12.3,12.67 11.91,12.28 11.91,11.48 12.67,10.73 23.02,10.73 24.03,11.74 24.03,13.77 27.46,17.2 30.77,17.2 32.16,18.59 32.16,19.99 33.31,21.14 39.78,21.14 40.54,21.9 40.54,26.63 | T1.14 41.81,46.22 41.81,30.28 40.54,29.01 40.54,26.63 | P4.1 40.53,26.62 40.54,26.63
P4_TX_N
  Top 0.203: U1.11 19.66,73.6 19.66,72.72 20.21,72.17 26.28,72.17 30.94,67.51 30.94,65.46 32.07,64.32 41.19,64.32 42.37,63.14 42.37,61.72 | 42.37,56.86 42.37,61.68 42.37,61.72 | 42.37,56.86 42.37,55.28 T1.6 | R8.2 42.37,56.86 | D23.P$2 42.37,61.72
P4_TX_P
  Top 0.203: U1.12 19.2,73.6 19.2,72.53 20.02,71.71 26.09,71.71 30.48,67.33 30.48,65.27 31.88,63.86 41,63.86 41.91,62.96 41.91,61.72 | 41.91,56.86 41.91,61.68 41.91,61.72 | 41.91,56.86 41.91,55.4 T1.7 | R7.2 41.91,56.86 | D23.P$1 41.91,61.72
PE  (via drill 0.81)  (2 unrouted)
  Top 1.27: v48.01,6.81 48.01,16.09 48.89,16.97 50.55,16.97 55.12,21.55 v55.12,22.94 55.15,22.97 C11.2 | v32.26,27.52 32.26,23.71 32.64,23.33 36.96,23.33 | C10.2 38.63,40.47 v40.64,40.47 | C7.2 48.46,40.47 v50.67,40.47 | C12.2 37.1,33.24 v37.21,33.36 P3.2 | P1.2 v47.37,33.36 | v47.37,22.94 47.37,23.08 P2.2
  Bottom 1.27: X11.P$3 X11.P$2 38.56,1.81 | v40.64,40.47 40.64,33.74 40.26,33.36 | v50.67,40.47 50.67,34.88 49.15,33.36 v47.37,33.36 | v32.26,27.52 24.38,27.52 X11.P$1 | v37.21,33.36 40.26,33.36 | 40.26,33.36 v47.37,33.36 | v37.34,22.94 v47.37,22.94 | v55.12,22.94 v47.37,22.94 | v47.37,33.36 v47.37,22.94
  Bottom 1.422: 38.56,1.81 43.26,1.81 44.58,3.13 44.58,5.29 46.1,6.81 v48.01,6.81
POE_PASSTHROUGH  (via drill 0.58)
  Top 1.016: v24,8.85 v24,5.55
  Bottom 1.016: v24,5.55 29.72,5.55 31.75,3.51 38.61,3.51 40.64,5.55 40.64,5.57 JP2.2 | v24,8.85 18.67,8.85 18.03,9.48 X11.1-4
POE_VIN  (via drill 0.58)
  Top 1.016: v9.4,12.4 D4.A
  Bottom 1.016: JP2.1 36.43,10.6 35.18,9.36 32,9.36 | 32,9.36 30.48,9.36 28.19,7.07 16.13,7.07 12.83,10.37 10.92,10.37 9.4,11.89 v9.4,12.4 | X11.2-4 32,9.36
RING  (via drill 0.6)
  Top 1.27: JP1.1 28.32,55.47 v28.32,23.45
  Bottom 0.406: v28.32,23.45 30.73,23.45 X11.2-5
SD_CLK
  Bottom 0.254: U3.34 42.32,76.77 R20.1
SD_CMD  (via drill 0.33)
  Top 0.254: U$14.3 61.76,73.78 59.56,71.59 41.02,71.59 40,72.6 40,77.55 v40.77,78.32
  Bottom 0.254: U3.36 41.32,78.87 v40.77,78.32
SD_DAT0  (via drill 0.33)
  Top 0.254: U$14.7 57.36,77 54.86,74.51 48.39,74.51 45.97,76.92 v43.81,76.92
  Bottom 0.254: v43.81,76.92 43.81,77.94 44.32,78.44 U3.30
SD_DAT1  (via drill 0.33)
  Top 0.254: U$14.8 56.26,77.04 55.12,75.9 47.75,75.9 45.97,77.68 v44.83,77.68
  Bottom 0.254: v44.83,77.68 44.83,79.39 U3.29
SD_DAT2  (via drill 0.33)
  Top 0.254: U$14.1 63.96,72.93 61.59,70.57 38.23,70.57 37.59,71.2 v37.59,76.41
  Bottom 0.254: v37.59,76.41 37.59,77.3 38.35,78.06 38.35,81.36 38.89,81.9 U3.39
SD_DAT3  (via drill 0.33)
  Top 0.254: U$14.2 62.86,73.61 60.32,71.08 40.51,71.08 39.37,72.22 39.37,76.41 38.99,76.79 v38.86,76.79
  Bottom 0.254: U3.38 39.15,81.4 38.86,81.11 v38.86,76.79
TIP  (via drill 0.6)
  Top 1.27: v26.29,23.45 26.29,52.93 JP1.2
  Bottom 0.406: X11.2-2 34.54,13.93 26.29,13.93 v26.29,23.45
UART_RX  (via drill 0.3)
  Top 0.203: U1.33 25.78,99.4 26.8,98.38 26.8,97.62 26.16,96.98 17.53,96.98 15.49,94.95 15.49,83.4 11.56,79.46 10.03,79.46 v9.52,78.95
  Top 0.254: 25.78,99.4 25.78,101.43 20.45,106.76 17.65,106.76 15.37,109.05 15.37,122 15.75,122.38 U6.3
  Bottom 0.203: ROUTER.13 19.93,60.92 19.18,61.68 19.18,64.98 18.92,65.23 16.76,65.23 9.52,72.47 v9.52,78.95
UART_TX  (via drill 0.3)
  Top 0.203: U1.34 28.32,99.4 27.3,98.38 27.3,97.37 26.42,96.48 17.78,96.48 16,94.7 16,83.14 11.81,78.95 10.67,78.95 10.29,78.57 v10.29,78.06
  Top 0.254: U1.34 28.32,101.43 27.81,101.94 26.03,101.94 17.91,110.07 17.91,122.26 17.27,122.89 U6.2
  Bottom 0.203: ROUTER.14 20.42,64.63 19.3,65.74 17.02,65.74 10.03,72.73 10.03,78.06 v10.29,78.06
USB2_D1_N
  Bottom 0.203: R11.2 29.78,111.59 27.08,114.28 23.02,114.28 22.38,114.92 13.36,114.92 12.83,114.38 12.83,111.46 12.45,111.08 11.69,111.08 SENSOR.5
USB2_D1_P
  Bottom 0.203: R10.1 29.41,112.61 27.27,114.74 23.21,114.74 22.57,115.38 12.42,115.38 11.56,114.51 11.56,113.49 SENSOR.6
USB2_D_N
  Bottom 0.203: U3.47 38.32,85.9 37.49,86.73 37.49,110.61 36.15,111.95 32.61,111.95 32.26,111.59 R11.1
USB2_D_P
  Bottom 0.203: U3.48 38.47,86.4 37.95,86.92 37.95,110.8 36.34,112.4 31.9,112.4 R10.2
USB3_D_N
  Bottom 0.203: U3.2 41.82,90.44 39.55,92.71 39.55,111.63 36.24,114.94 34.21,114.94 30.91,118.24 30.91,127.89 28.62,130.18 13.44,130.18 BEE-CON-1.8
USB3_D_P
  Bottom 0.203: U3.3 42.32,90.51 39.95,92.88 39.95,111.8 36.41,115.35 34.37,115.35 31.32,118.41 31.32,128.06 28.79,130.59 13.66,130.59 BEE-CON-1.7
USB4_D_N
  Bottom 0.203: U3.4 42.82,95.89 47.03,100.11 52.32,100.11 | 52.32,100.11 58.76,100.11 60.56,98.3 USB1.2 | D2.P$1 52.32,100.11
USB4_D_P
  Bottom 0.203: U3.5 43.32,95.82 47.2,99.7 52.32,99.7 | 52.32,99.7 58.59,99.7 59.44,98.86 59.44,98.13 58.72,97.41 USB1.3 | D1.P$1 52.32,99.7
USB_N  (via drill 0.3)
  Top 0.203: U1.50 49.67,78.21 54.58,78.21 55.6,79.24 55.6,84.25 54.7,85.15 51.31,85.15 v51.31,85.4
  Bottom 0.203: v51.31,85.4 51.31,85.15 50.67,85.15 49.92,84.4 U3.17
USB_P  (via drill 0.3)
  Top 0.203: U1.49 49.67,78.67 54.39,78.67 55.14,79.43 55.14,84.06 54.52,84.69 51.31,84.69 v51.31,84.44
  Bottom 0.203: v51.31,84.44 51.31,84.64 51.33,84.67 51.82,84.67 52.07,84.92 52.07,85.68 51.56,86.19 50.8,86.19 49.51,84.9 U3.16
VCC1.8  (via drill 0.33)
  Top 0.254: v52.2,81.11 v49.66,81.11 | v46.35,83.9 46.35,85.94 v46.74,86.32
  Top 0.406: v45.34,94.06 45.34,89.75 46.35,88.73 50.16,88.73 v50.42,88.98
  Bottom 0.203: v52.2,81.11 C32.1 | U3.12 49.72,87.9 50.42,88.6 50.42,88.86 | v50.42,88.98 C33.1 | U3.19 49.91,83.4
  Bottom 0.254: C31.1 50.22,81.11 v49.66,81.11 49.37,81.4 U3.23 | 49.91,83.4 50.67,83.4 51.69,82.38 51.94,82.38 52.2,82.13 v52.2,81.11 | U3.19 46.86,83.4 v46.35,83.9 | v46.74,86.32 46.82,86.4 U3.12
  Bottom 0.406: R16.1 v45.34,94.06 | v50.42,88.98 50.42,88.86
VCC3.3
  Bottom 0.203: 51.18,81.36 50.67,81.87 48.35,81.87 U3.22
  Bottom 0.254: 50.67,86.83 49.25,85.4 U3.15 | 44.32,90.89 43.82,90.39 U3.6 43.82,86.32 | U3.1 40.6,87.9 C30.1 | 35.94,81.62 C26.1 36.07,81.62 36.32,81.87 36.32,83.02 37.72,84.41 39.81,84.41 U3.44 | C24.1 37.08,79.59 37.34,79.84 37.34,82.38 38.35,83.4 U3.42 | 51.18,81.36 51.18,81.31 C27.1
  Bottom 0.305: U3.42 41.4,83.4 | C24.1 C25.1 | C28.1 50.67,86.83 | 44.32,90.89 C29.1 | C23.1 47.57,90.38 46.99,90.38 45.82,89.21 U3.10 45.82,86.73 45.85,86.7 | U3.15 47.34,85.4 47.12,85.17 46.35,85.17 45.85,85.68 45.85,86.19 | U3.44 41.39,84.4 41.4,84.41 | 45.34,81.87 45.37,81.9 U3.22 | U3.1 41.32,86.65 41.4,86.57
  Bottom 0.406: C23.1 48.62,90.97 R27.1 | 45.34,84.92 45.85,84.92 45.85,86.19 45.85,86.7 | 43.82,86.32 43.82,85.17 44.07,84.92
  Bottom 0.813: 45.34,81.87 42.54,81.87 41.4,83.02 41.4,83.4 41.4,84.41 41.4,84.92 | 41.4,84.92 44.07,84.92 45.34,84.92 45.72,84.92 | 41.4,86.57 41.4,84.92
VDD  (via drill 0.3, 0.58)
  Top 0.254: R46.1 v8,41.77 | R57.2 v60.2,29.85
  Top 0.61: U4.8 v62.74,18.5 62.99,18.25 65.34,18.25 C43.1 67.79,18.31 C56.1 | C19.1 11.41,28.22 10.54,29.09 U2.8
  Top 1.27: C19.1 C53.1 19.77,28.22 19.81,28.18 | 19.81,28.18 19.81,30.56 21.01,31.76 21.01,31.83 | 19.81,28.18 F2.P$2 | ROUTER.15 22.96,59.31 21.13,57.49 21.13,31.96 21.01,31.83 | D33.C 21.15,32.73 21.01,32.59 21.01,31.83
  Bottom 0.254: v8,41.77 22.2,41.77 23.62,40.34 23.62,32.88 D33.C | v60.2,29.85 57.15,29.85 56.59,29.29 56.59,19.01 56.08,18.5
  Bottom 1.27: v62.74,18.5 56.08,18.5 55.14,18.5 53.97,17.33 35.66,17.33 34.34,18.65 34.34,31 32.6,32.73 D33.C
  pour Top (isolate 0.406, no thermals): 10.16,31.45 11.43,31.45 11.43,29.55 19.05,29.55 19.05,26.88 10.16,26.88
  pour Top (isolate 0.254, no thermals): 63.25,21.17 63.25,20.02 68.83,20.02 68.83,17.36 62.36,17.36 62.36,21.17
VIN1
  Top 1.27: D4.C 3.61,12.4 4.57,13.37 4.57,19.87 5.69,20.99 6.64,20.99 V1.P$2
  Top 1.524: D5.C D4.C | V1.P$2 6.68,21.02 6.68,19.13 6.71,19.11 L3.P$1
WLAN_LED
  Top 0.254: 18.16,99.88 U1.30 | WLAN.A 19.64,158.07 8.64,158.07 2.29,151.72 2.29,104.48 3.3,103.46 10.03,103.46 11.43,102.06 17.02,102.06 18.16,100.92 U1.30 | U1.30 18.16,99.53 18.29,99.4 18.29,99.9 U1.30
XSCI
  Bottom 0.254: X1.1 34.92,85.99 C18.1 36.02,86.06 36.7,86.06 37.37,85.4 U3.46
XSCO
  Bottom 0.254: X1.3 32.6,84.5 33.4,85.3 35.38,85.3 C21.1 36.1,84.9 U3.45

## Text on the board
tPlace: MODEL Pan v1.7 | 3V3 | +5V
bNames: U$14
tDocu: USB3+ | USB3-